# Altium PCB recall_mcu_v0_1.PcbDoc
Units mil, origin at the board's own origin, x right, y up, seen from the top; angles counter-clockwise.
Board outline 1000 x 1000 mil, 4 copper layers (Component Side, Signal Layer, Ground Plane, Solder Side), stack 33.234 mil thick; 11 components, 9 nets, 34 pads, 6 vias.
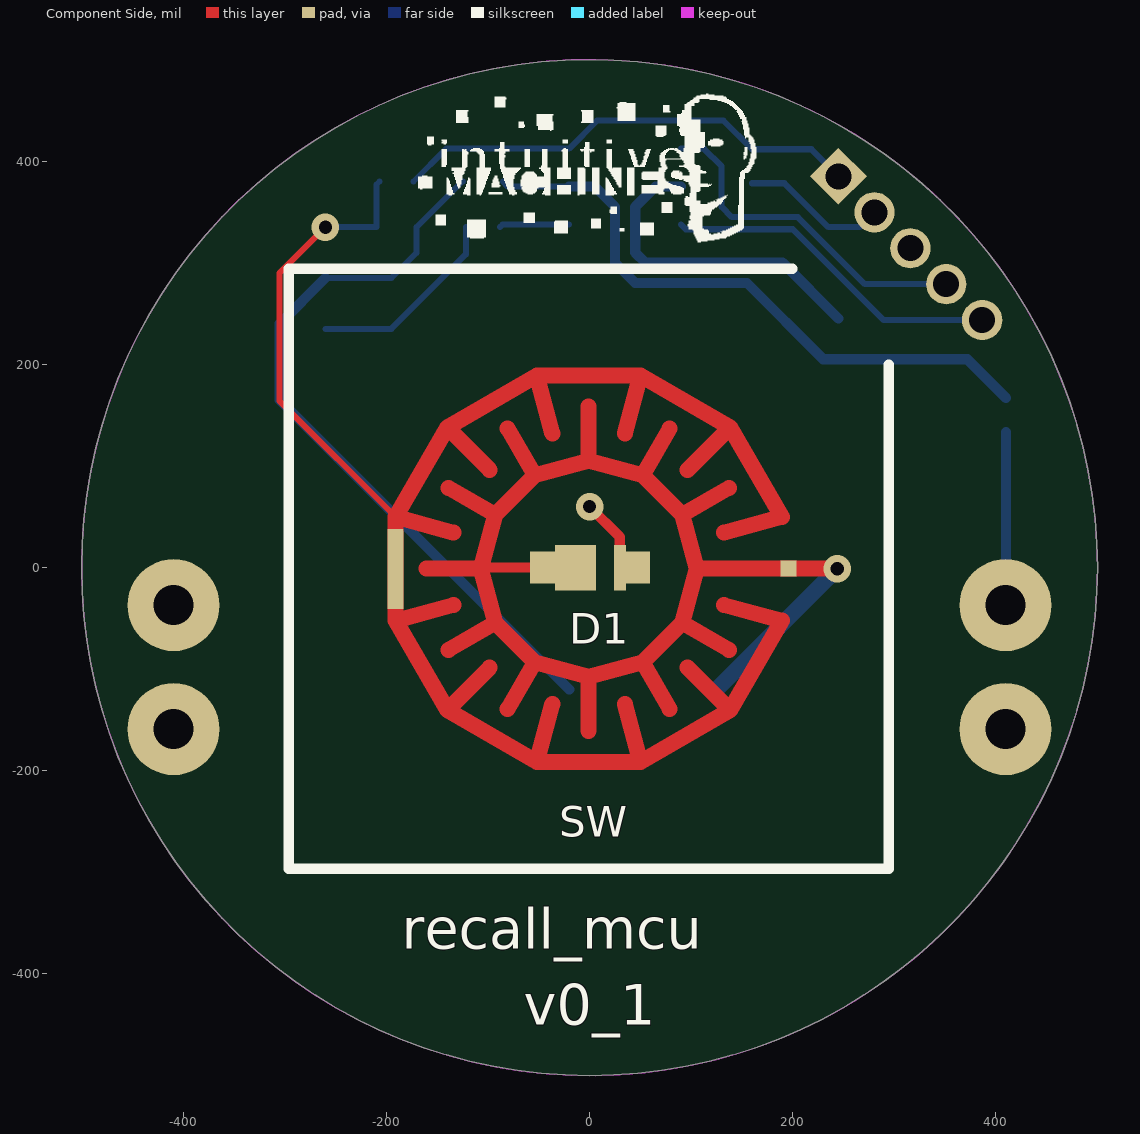
[diagram p0: Component Side view]
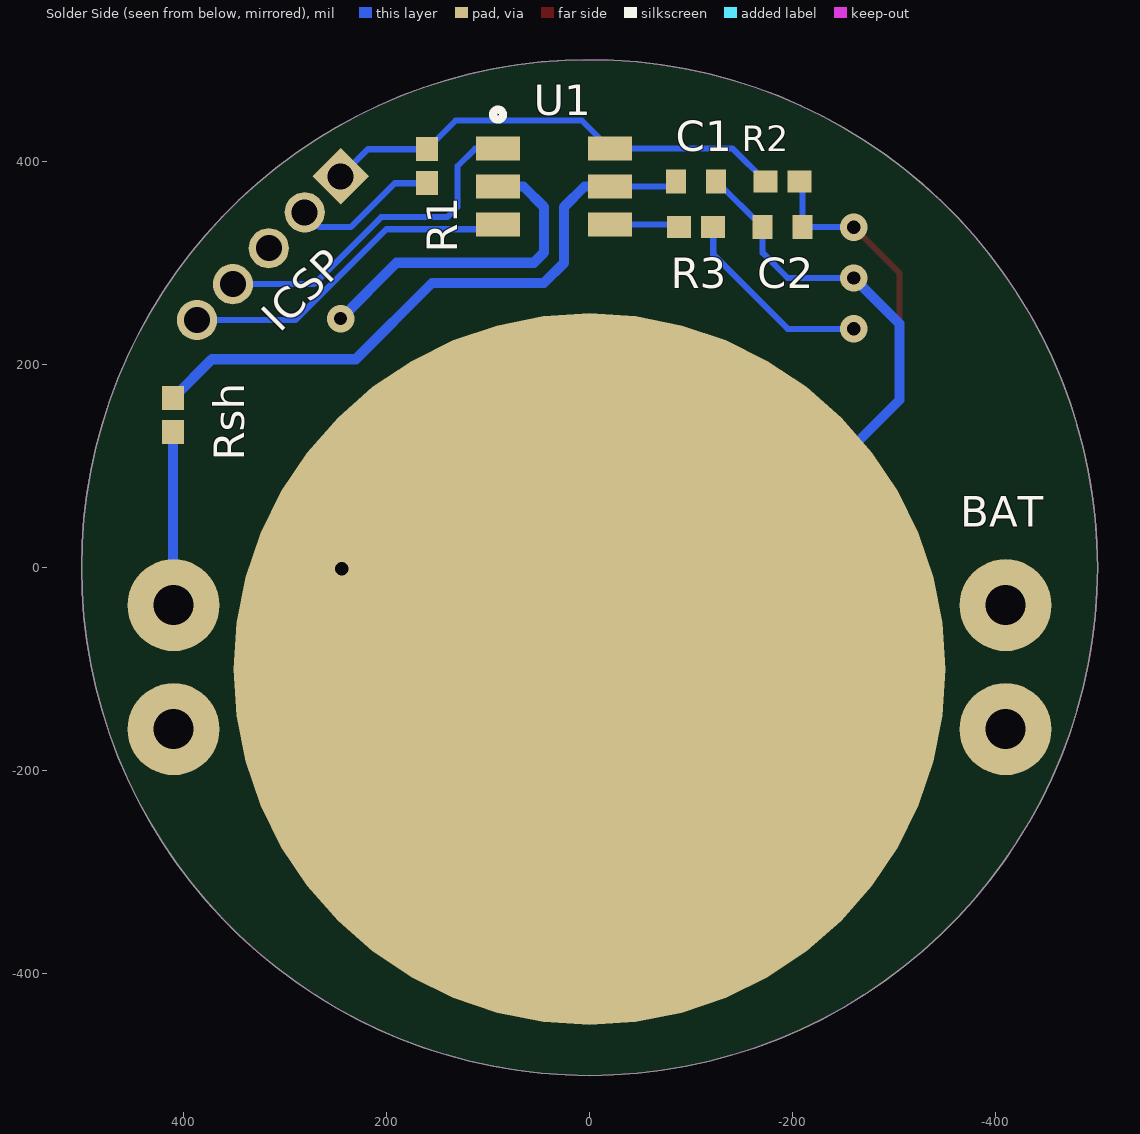
[diagram p1: Solder Side view, seen from below]
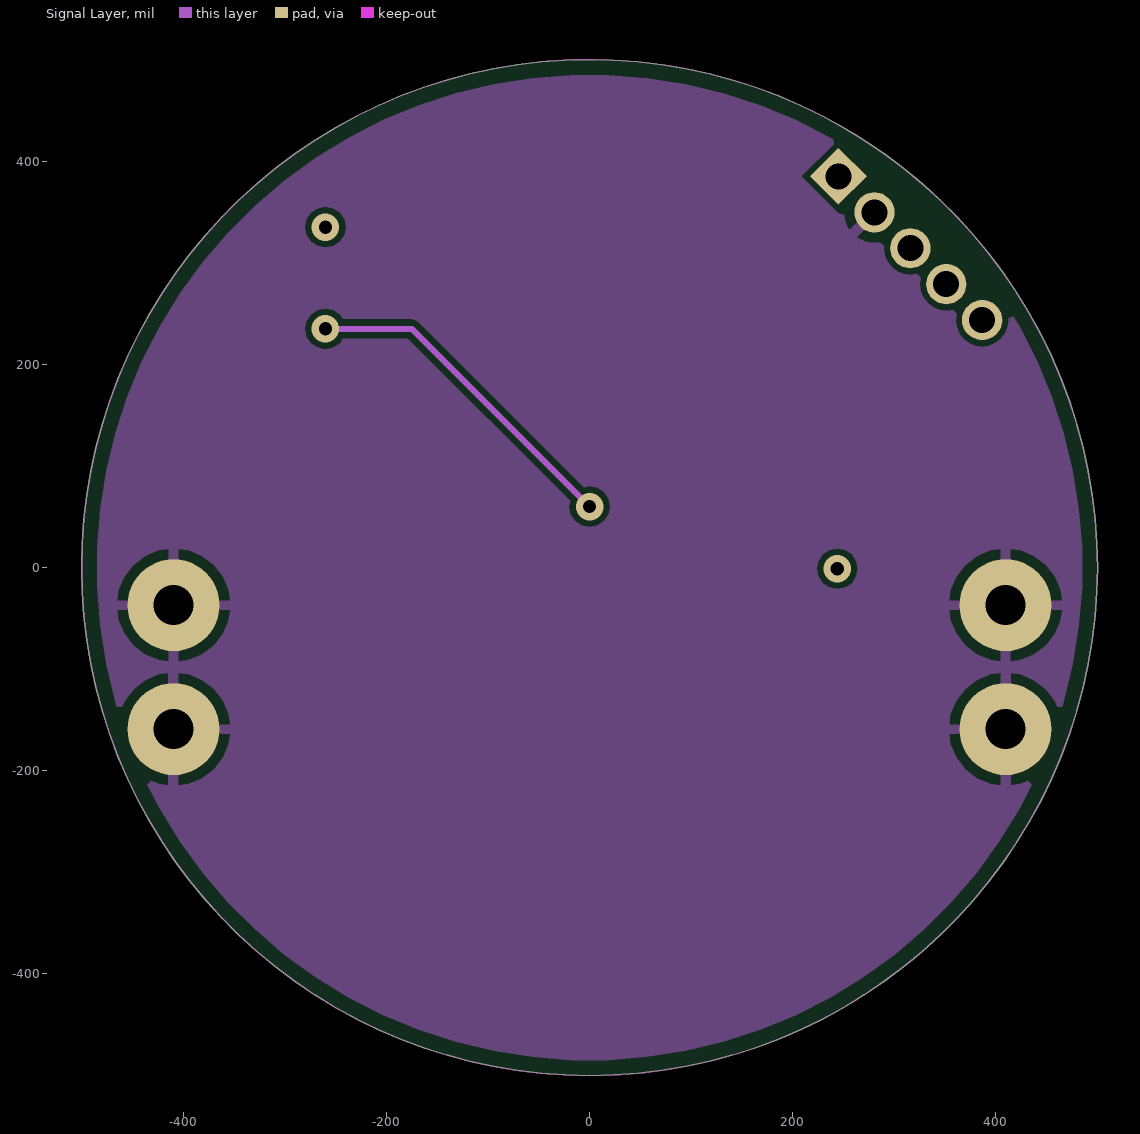
[diagram p2: Signal Layer]
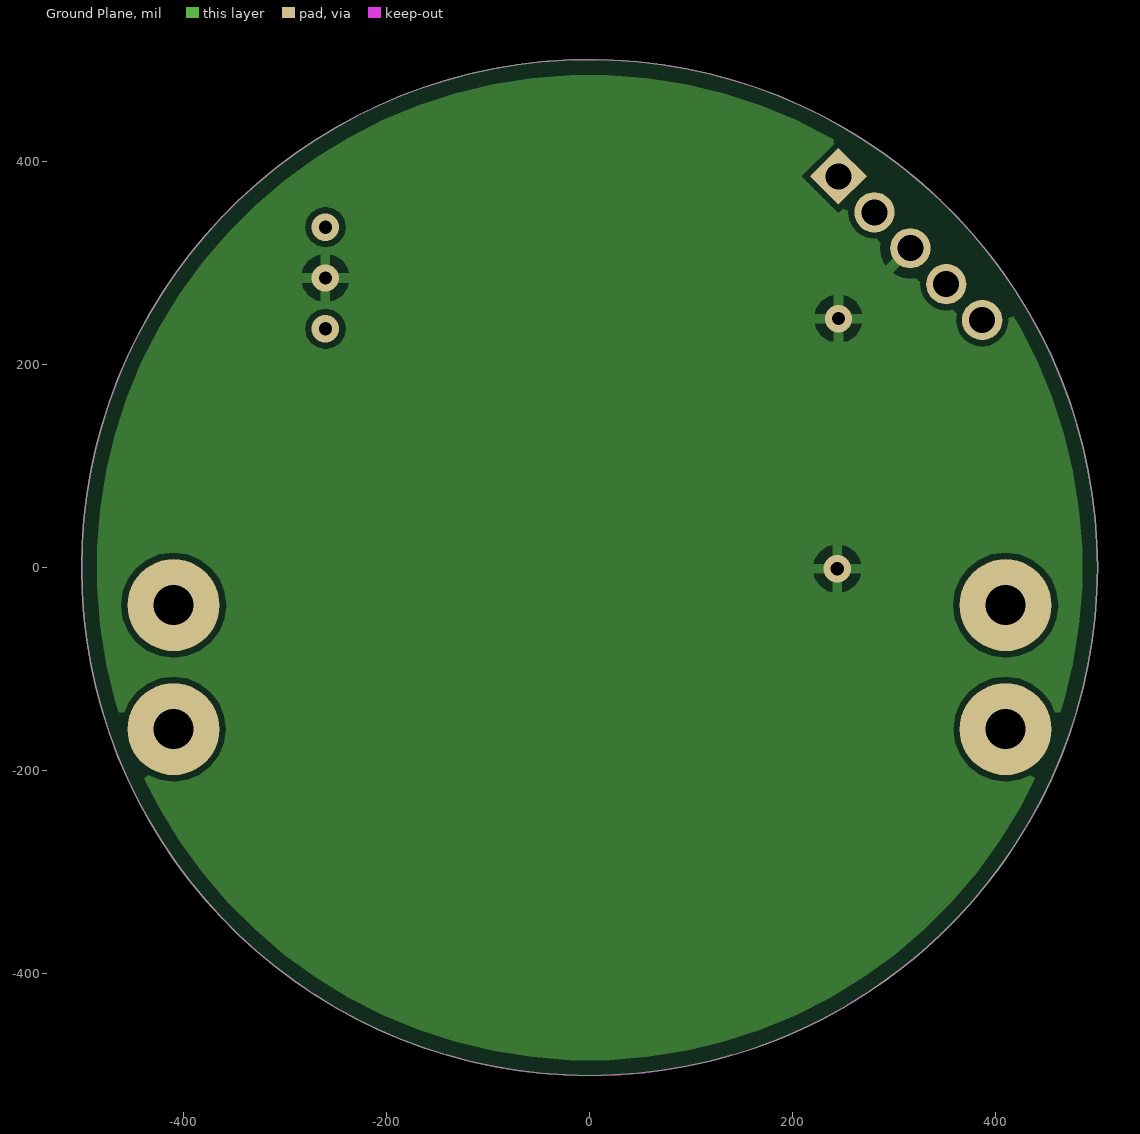
[diagram p3: Ground Plane]
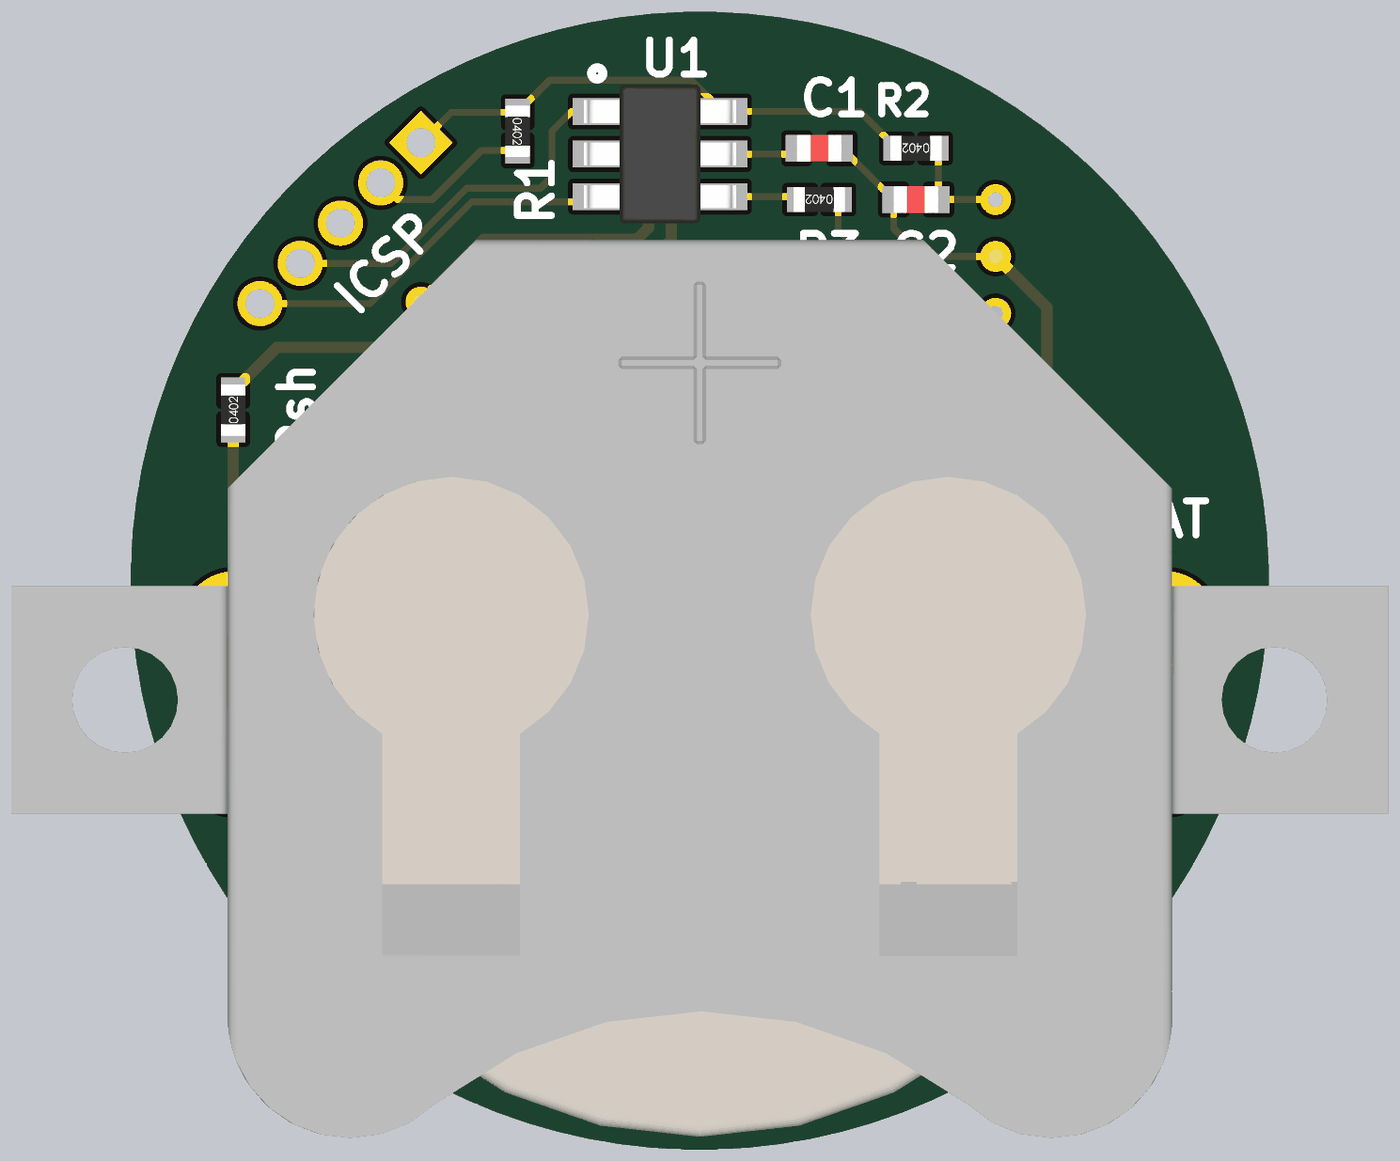
[diagram p4: 3D render of the assembled board from below, using the file's embedded part models]

## Layer stack, top to bottom
Top Solder: solder mask 0.4, Solder Resist, Dk 3.5
Component Side: signal copper 1.4
Dielectric 1: core 12.6, FR-4, Dk 4.8
Signal Layer: signal copper 1.417
Dielectric 3: prepreg 5, Dk 4.2
Ground Plane: signal copper 1.417
Dielectric 4: core 10, Dk 4.2
Solder Side: signal copper 1.4
Bottom Solder: solder mask 0.4, Solder Resist, Dk 3.5

## Board outline
0,-500 cw(c0,0) -500,0 cw(c0,0) 0,500 cw(c0,0) 500,0 cw(c0,0)

## Design rules (kind name [scope] priority, off if disabled: settings)
BoardOutlineClearance [All] p1: gap=15
Clearance [All] p1: gap=6
HoleSize [All] p1: absolutevalues=TRUE maxlimit=100 minlimit=13 maxpercent=80.000 minpercent=20.000
HoleToHoleClearance [All] p1: gap=6 allowstackedmicrovias=TRUE
MinimumAnnularRing [All] p1: minimumring=7
MinimumSolderMaskSliver [All] p1: minsoldermaskwidth=0
PolygonConnect [All] p1: connectstyle=Relief reliefconductorwidth=10 reliefentries=4 polygonreliefangle="90 Angle" airgapwidth=10
RoomDefinition recall_mcu_v0_1 [InComponentClass('recall_mcu_v0_1')] p1: confinementstyle=ConfineIn formatcopy=TRUE lockcomponents=FALSE outline -3105,-2070 3685,-2070 3685,2625 -3105,2625
RoutingVias [All] p1: holewidth=13 width=27 viastyle="Through Hole" minholewidth=13 minwidth=27 maxholewidth=28 maxwidth=50
SilkToSilkClearance [All] p1: silktosilkclearance=6
SilkToSolderMaskClearance [IsPad] p1: minsilkscreentomaskgap=6 clearancetoexposedcopper=TRUE
SolderMaskExpansion [All] p1: expansion=4
Width [All] p1: maxlimit=50 minlimit=6 preferedwidth=6
25 further rules are at their usual default settings.

## Components (designator, comment, footprint, x,y, rotation, side; value= is the part's Value field where it differs from the comment)
BAT "CR2032" BAT-HLD-001-THM 0,-100 r0 bottom
C1 "CAP" CAP_0402R -105,380 r0 bottom
C2 "CAP" CAP_0402R -190,335 r180 bottom
D1 "MP2016" MP2016 15,0 r0 top
ICSP "Header 5" HDR1X5_ICSP 245,385 r315 bottom
R1 "RES" RES_0402 160,395 r270 bottom
R2 "RES" RES_0402 -190,380 r0 bottom
R3 "RES" RES_0402 -105,335 r0 bottom
Rsh "RES" RES_0402 410,150 r90 bottom
SW "SW-PB" TRELLIS_1x1 0,0 r0 top locked
U1 "PIC10F320" SOT-23-6 35,375 r180 bottom

## Footprints (in the part's own frame and the unit in brackets; to place one, negate y for a bottom-side part, rotate by r counter-clockwise, add the part's x,y. Pads: shape width x height; smd on the part's side, far side on the other; paste and mask are expansions set on the pad)
BAT-HLD-001-THM [mm] "Battery holder for CR2032"
  round 2.3 hole 1: 1(-10.4,-1.6) 1(-10.4,1.5) 1(10.4,-1.6) 1(10.4,1.5)
  round 17.8 smd: 2(0,0)
  body extent -15.37,-10.15 15.37,9.9, height 3.96
CAP_0402R [mm] "Capacitor 0402 reflow soldering"
  rect 0.5x0.6 smd: 1(-0.5,0) 2(0.5,0)
  body extent -0.5,-0.3 0.5,0.3, height 0.2
HDR1X5_ICSP [mm] "Connector; Header; 1x5Position"
  rect 1.006x1.006 hole 0.65: 1(0,0)
  round 1.006 hole 0.65: 2(1.27,0) 3(2.54,0) 4(3.81,0) 5(5.08,0)
MP2016 [mm] "Luminus XNOVA LED"
  rect 0.3x1.14 smd: A(0.375,0)
  rect 0.6x0.8 smd: A(0.825,0)
  rect 0.63x0.8 smd: C(-1.56,0)
  rect 1.02x1.14 smd: C(-0.735,0)
  body extent -1.36,-0.8 0.64,0.8, height 0.55
RES_0402 [mm]
  rect 0.6x0.55 smd: 1(-0.425,0) 2(0.425,0)
  body extent -0.58,-0.28 0.57,0.27, height 0.41
SOT-23-6 [mm] "PIC10F320"
  rect 1.1x0.6 smd: 1(-1.4,0.95) 2(-1.4,0) 3(-1.4,-0.95) 4(1.4,-0.95) 5(1.4,0) 6(1.4,0.95)
  silkscreen extent -1.53,1.68 -1.28,1.92, body extent -1.7,-1.55 1.7,1.55, height 1.14
TRELLIS_1x1 [mm]
  rect 0.4x2 smd: 1(-4.851,-0.04)
  rect 0.4x0.4 smd: 2(4.979,-0.03)
  Component Side lines w0.4: -4.071,-0.03 -2.721,-0.03 ; -3.528,-2.055 -2.359,-1.38 ; -3.528,1.995 -2.359,1.32 ; -3.402,-0.936 -4.851,-1.324 ; -3.402,0.876 -4.851,1.264 ; -2.496,-2.505 -3.557,-3.565 ; -2.496,2.445 -3.557,3.506 ; -2.046,-3.537 -1.371,-2.368 ; -2.046,3.478 -1.371,2.308 ; -0.927,-3.41 -1.315,-4.86 ; -0.927,3.351 -1.315,4.8 ; -0.021,-4.08 -0.021,-2.73 ; -0.021,4.02 -0.021,2.67 ; 0.885,-3.41 1.273,-4.86 ; 0.885,3.351 1.273,4.8 ; 2.004,-3.537 1.329,-2.368 ; 2.004,3.478 1.329,2.308 ; 2.454,-2.505 3.515,-3.565 ; 2.454,2.445 3.515,3.506 ; 3.36,-0.936 4.809,-1.324 3.515,-3.565 ; 3.36,0.876 4.809,1.264 3.515,3.506 ; 3.486,-2.055 2.317,-1.38 ; 3.486,1.995 2.317,1.32 ; 4.929,-0.03 2.679,-0.03 ; -4.851,-1.324 -3.557,-3.565 ; -4.851,-1.324 -4.851,1.264 ; -4.851,1.264 -3.557,3.506 ; -3.557,-3.565 -1.315,-4.86 ; -3.557,3.506 -1.315,4.8 ; -2.721,-0.03 -2.359,-1.38 ; -2.721,-0.03 -2.359,1.32 ; -2.359,-1.38 -1.371,-2.368 ; -2.359,1.32 -1.371,2.308 ; -1.371,-2.368 -0.021,-2.73 ; -1.371,2.308 -0.021,2.67 ; -1.315,-4.86 1.273,-4.86 ; -1.315,4.8 1.273,4.8 ; -0.021,-2.73 1.329,-2.368 ; -0.021,2.67 1.329,2.308 ; 1.273,-4.86 3.515,-3.565 ; 1.273,4.8 3.515,3.506 ; 1.329,-2.368 2.317,-1.38 ; 1.329,2.308 2.317,1.32 ; 2.317,-1.38 2.679,-0.03 ; 2.317,1.32 2.679,-0.03
  silkscreen extent -7.52,-7.53 7.48,7.47, body extent -7.52,-7.54 7.48,7.46, height 11.55

## Part data
BAT: library part Battery
C1 C2: "Capacitor"
D1: "MP2016 White LED"
ICSP: "Header, 5-Pin"
R1 R2 R3 Rsh: "Resistor"
SW: "Translucent Conductive Silicone Elastomer Switch"
U1: "6-Pin Flash-Based, 8-Bit Microcontroller"

## Via types
v1: diameter 27, hole 13, Ground Plane to Solder Side, 2 vias
v2: diameter 27, hole 13, Component Side to Solder Side, 2 vias
v3: diameter 27, hole 13, Component Side to Signal Layer, 1 vias
v4: diameter 27, hole 13, Signal Layer to Solder Side, 1 vias

## Nets (pads, with @x,y where several pads share a name; then routed paths per layer and width w, separated by ;. In a path a pad name is that pad's centre, name@x,y a point inside that pad or via, vN(x,y) a via of type N, cw(c..) or ccw(c..) an arc to the next point about the centre after c; other vN are vias at no path point)
GND: BAT.2 C1.1 C2.1 D1.C ICSP.3 SW.2 U1.2 | length 1366
  Component Side w10: -107.13,-1.17 -105.96,0 -46.42,0 D1.C@-13.94,0
  Component Side w15.75: SW.2 v2(243.83,-1.17)
  Solder Side w6: v1(-260,285) -195,285 -170.31,309.69 C2.1 -125.31,380 C1.1
  Solder Side w10: v1(-260,285) -305,240 -305,165 BAT.2@-20,-120 ; U1.2 65,375 45,355 45,310 55,300 190,300 v1(245,245)
  Solder Side w15.75: BAT.2@125,-120 v2(243.83,-1.17)
ICSP_CLK: ICSP.5 U1.3 | length 344.3
  Solder Side w6: U1.3 94.72,333 200.03,333 289.45,243.58 ICSP.5@376.42,243.58 ; ICSP.5@375,245 ICSP.5@376.42,243.58 ; ICSP.5@381.42,238.58 ICSP.5@376.42,243.58 ; ICSP.5 ICSP.5@376.42,243.58
ICSP_DAT: ICSP.4 U1.1 | length 341.2
  Solder Side w6: U1.1 112.6,412.4 130,395 130,355 140,345 205,345 271.07,278.93 ICSP.4 ; ICSP.4@350,285 ICSP.4@351.07,283.93
NetC1_2: C1.2 Rsh.2 U1.5 | length 615.9
  Solder Side w6: C1.2 -80.31,375 U1.5
  Solder Side w10: U1.5 5,375 25,355 25,300 45,280 155,280 230,205 371.73,205 Rsh.2
NetC2_2: C2.2 R2.1 SW.1 | length 447.6
  Component Side w6: v2(-260,335) -305,290 -305,163.81 -190.97,49.78
  Solder Side w6: v2(-260,335) C2.2 -209.69,377.05 R2.1
NetD1_A: D1.A R3.1 | length 600.2
  Component Side w10: v3(0,60) 29.76,30.24 D1.A@29.76,0
  Signal Layer w6: v4(-260,235) -175,235 v3(0,60)
  Solder Side w6: v4(-260,235) -195,235 -121.73,308.27 R3.1
NetR3_2: R3.2 U1.4 | length 69.2
  Solder Side w6: R3.2 -85.67,337.6 U1.4
VDD: BAT.1 ICSP.2 R1.2 Rsh.1 | length 335.4
  Signal Layer w10: BAT.1@409.06,-159.06 BAT.1@410,-160
  Solder Side w6: R1.2 191.73,378.27 235,335 265.71,335 ICSP.2
  Solder Side w10: BAT.1@410,-56.46 Rsh.1
VPP: ICSP.1 R1.1 R2.2 U1.6 | length 465.9
  Solder Side w6: R2.2 -140.87,412.4 U1.6 7.48,440 131.73,440 R1.1 218.27,411.73 ICSP.1

## Polygon pours and split planes (outlines as drawn)
GND on Ground Plane "Ground Plane" (solid, remove dead copper, pour order 0): 0,-511.81 cw(c0,0) -511.81,0 cw(c0,0) 0,511.81 cw(c0,0) 511.81,0 cw(c0,0)
VDD on Signal Layer "Power Plane" (solid, pour order 2): 0,-500 cw(c0,0) -500,0 cw(c0,0) 0,500 cw(c0,0) 500,0 cw(c0,0)

## Keep-outs
Keep-Out Layer:
  circle w1: c0,0 r500

## Silkscreen, mask and mechanical layers (free items; w line width, h text height)
Top Overlay:
  drawing of 44 lines, arcs and shapes, not listed
  text "recall_mcu" at -185,-375 h40
  text "v0_1" at -65,-450 h40